# Altium PCB Mini_AHRS_TEST.PcbDoc
Units mil, origin at the board's own origin, x right, y up, seen from the top; angles counter-clockwise.
Board outline 1496.06 x 1496.06 mil, 2 copper layers (Top Layer, Bottom Layer); 59 components, 52 nets, 234 pads, 64 vias.
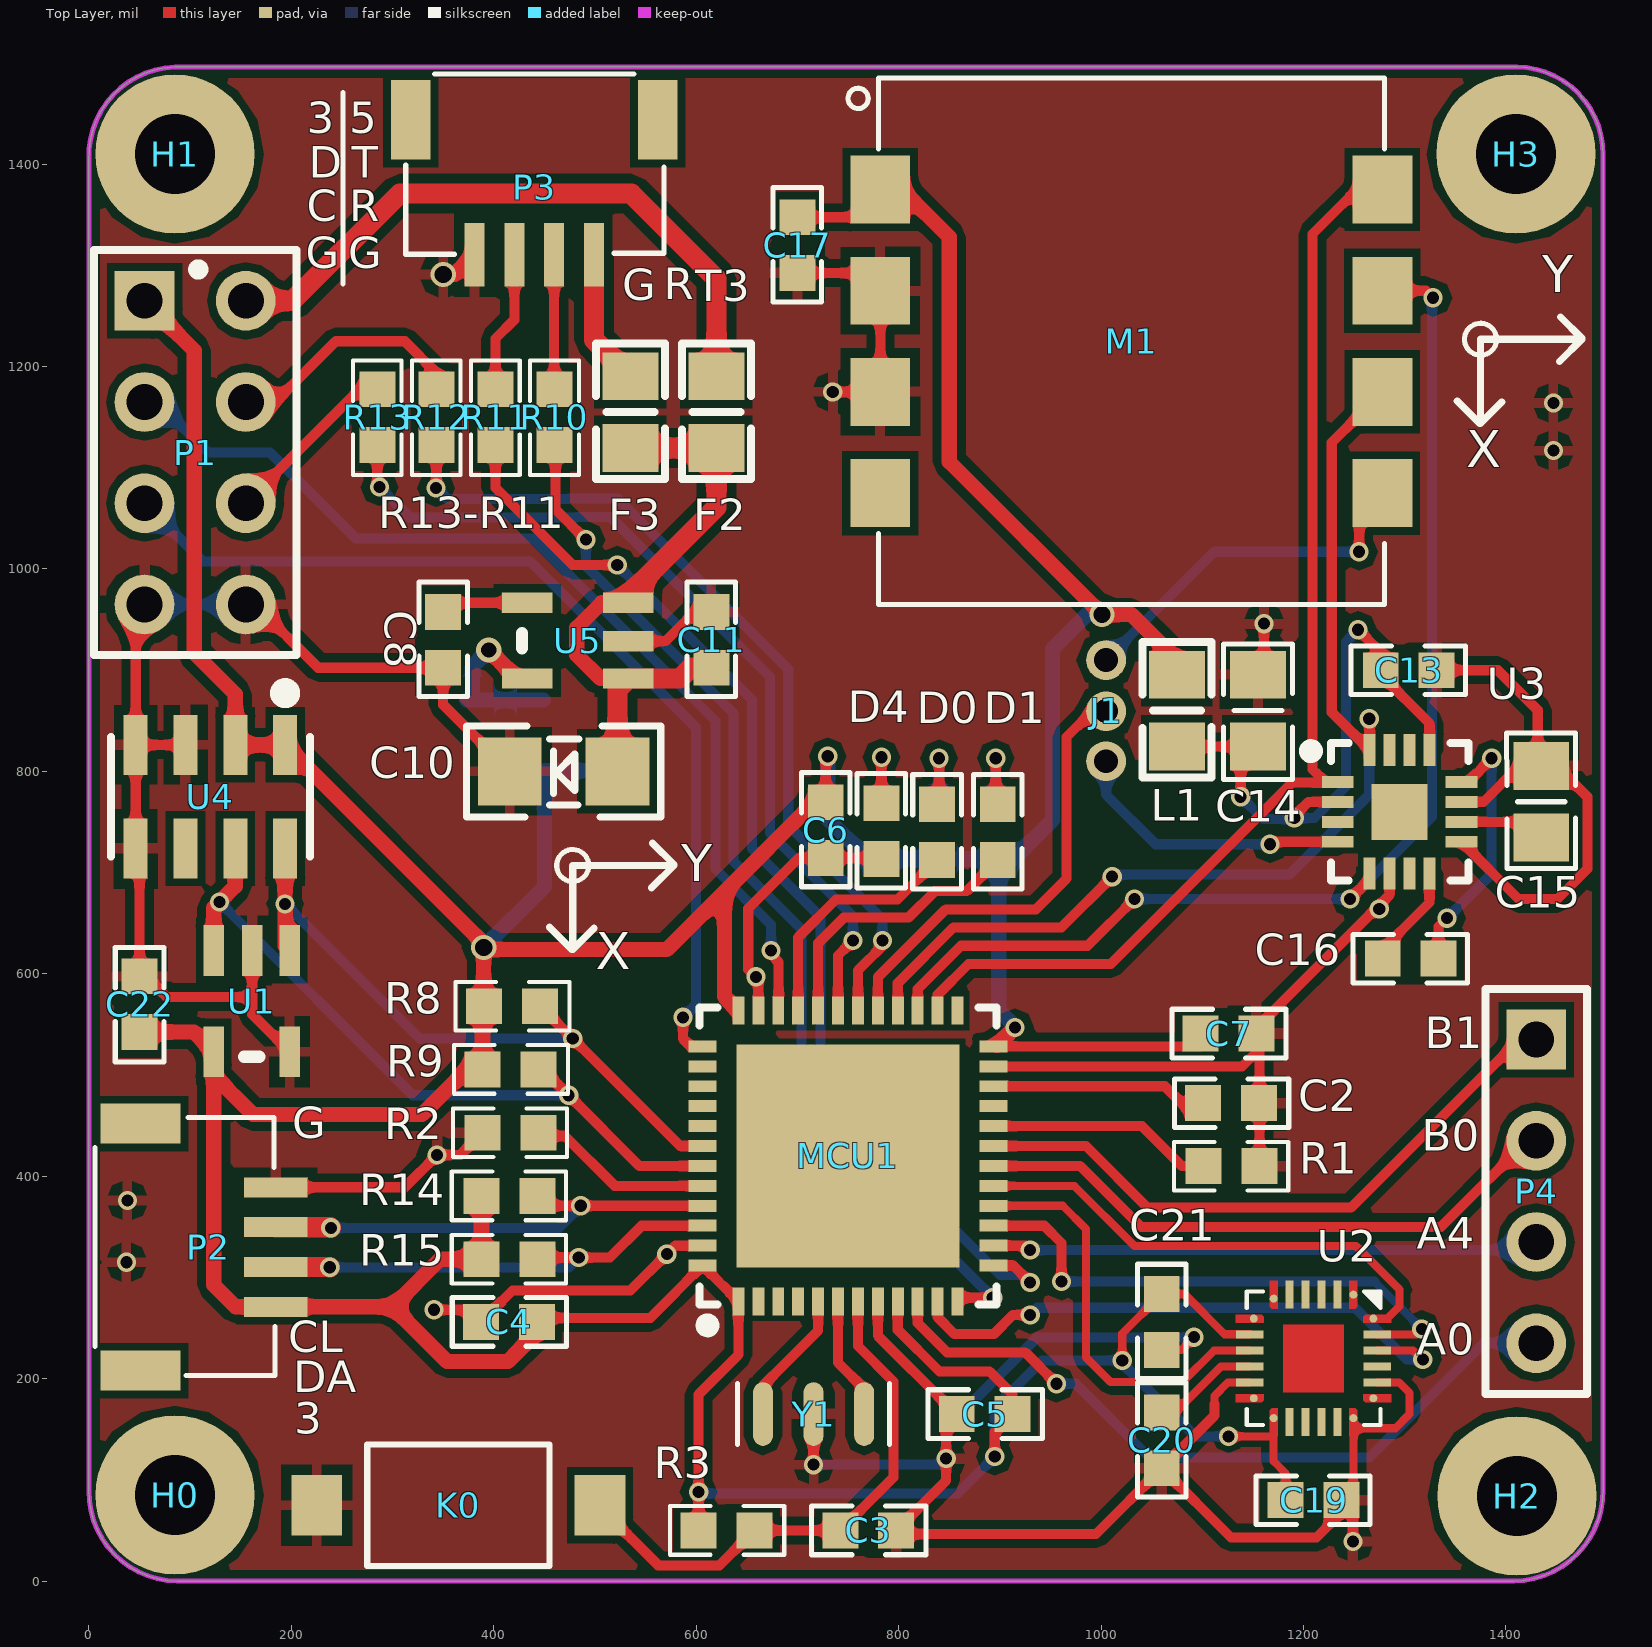
[diagram p0: Top Layer view]
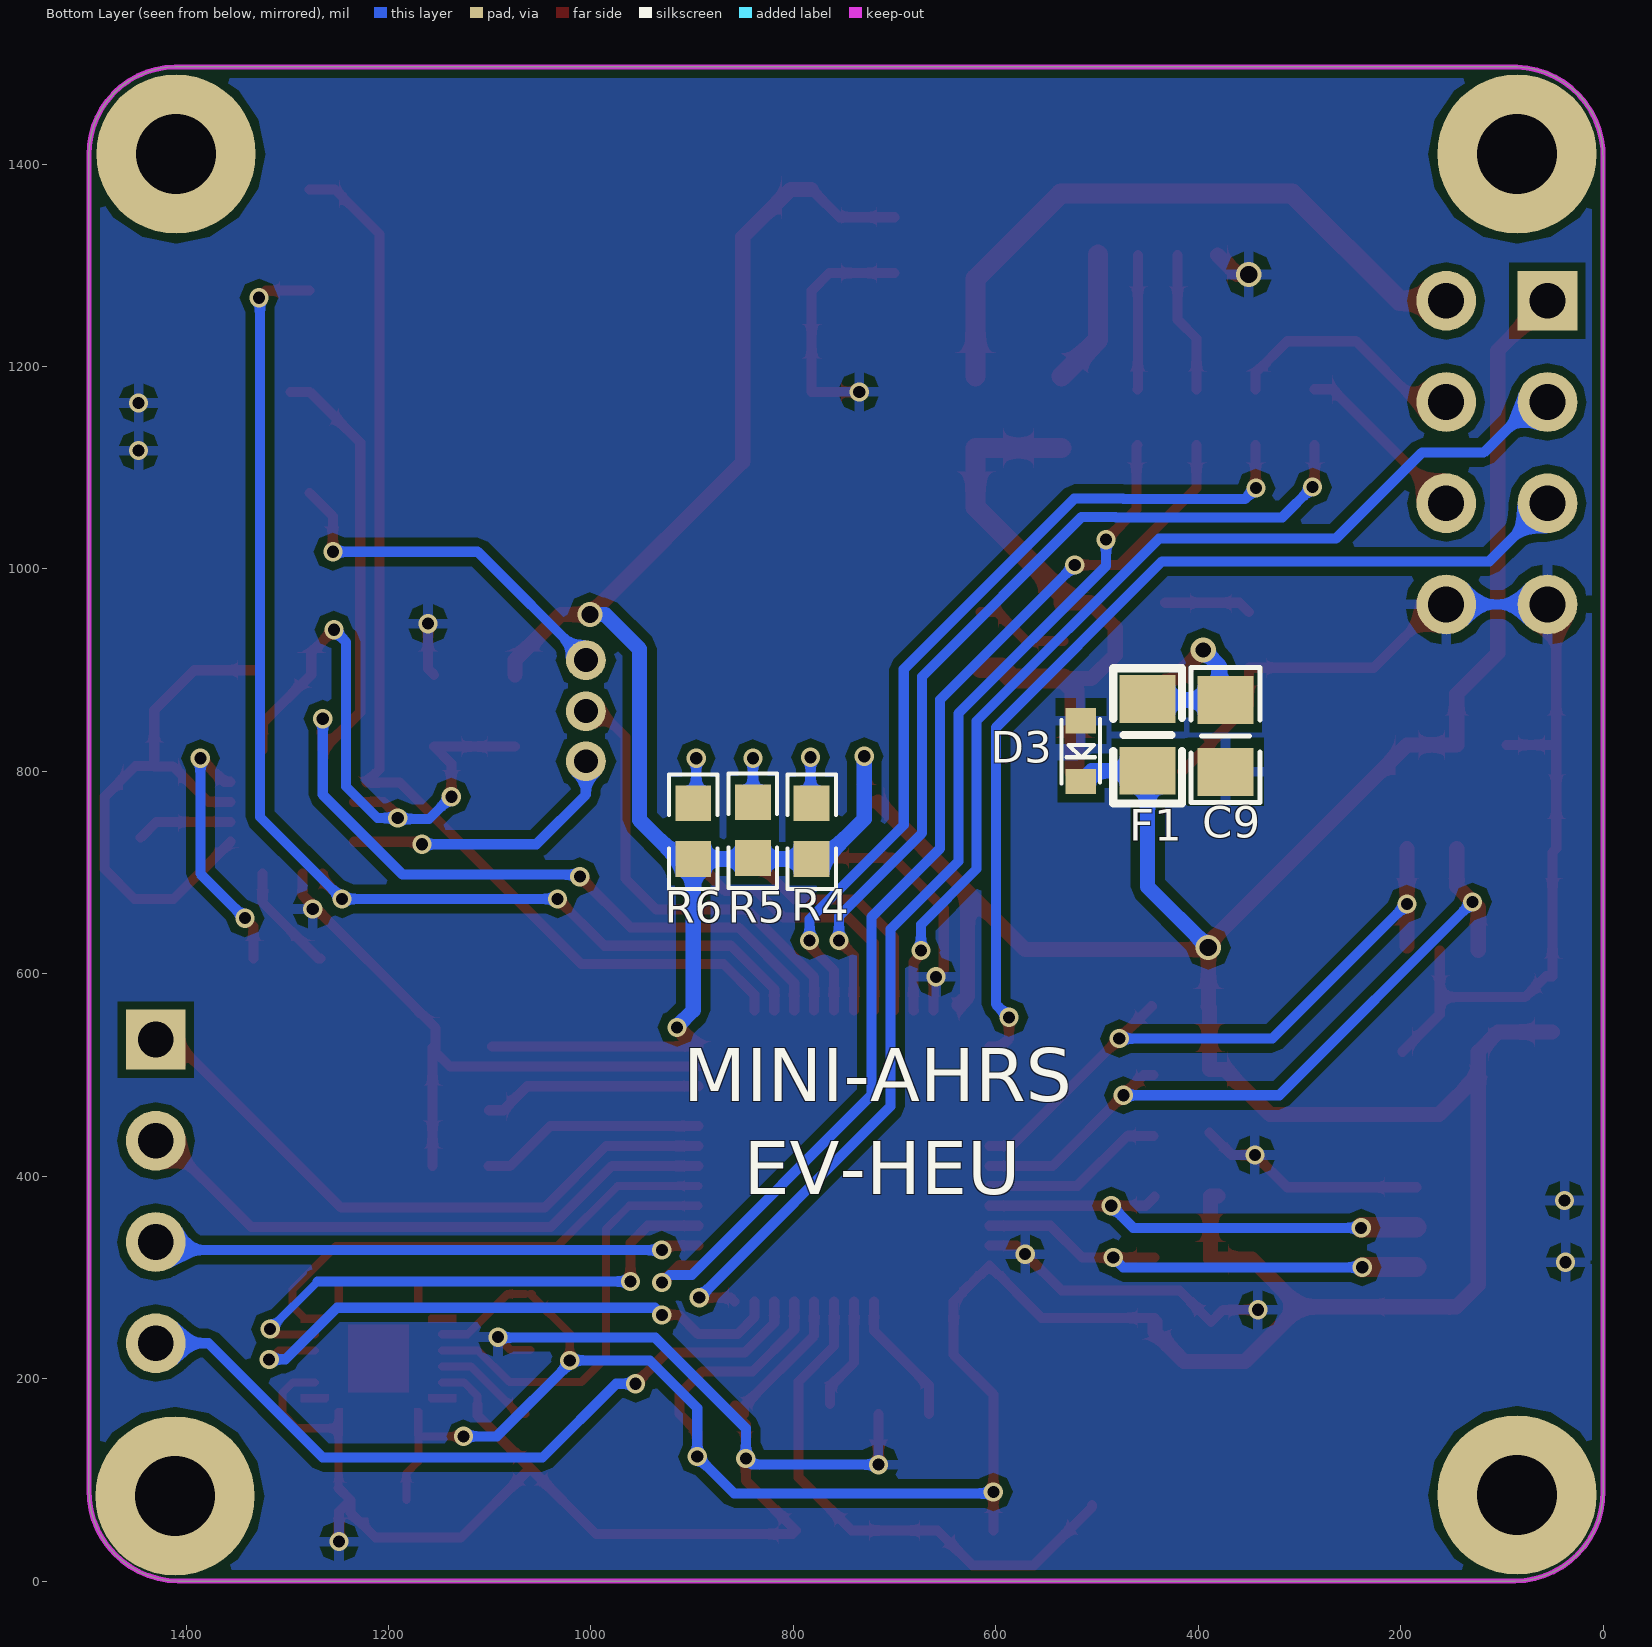
[diagram p1: Bottom Layer view, seen from below]
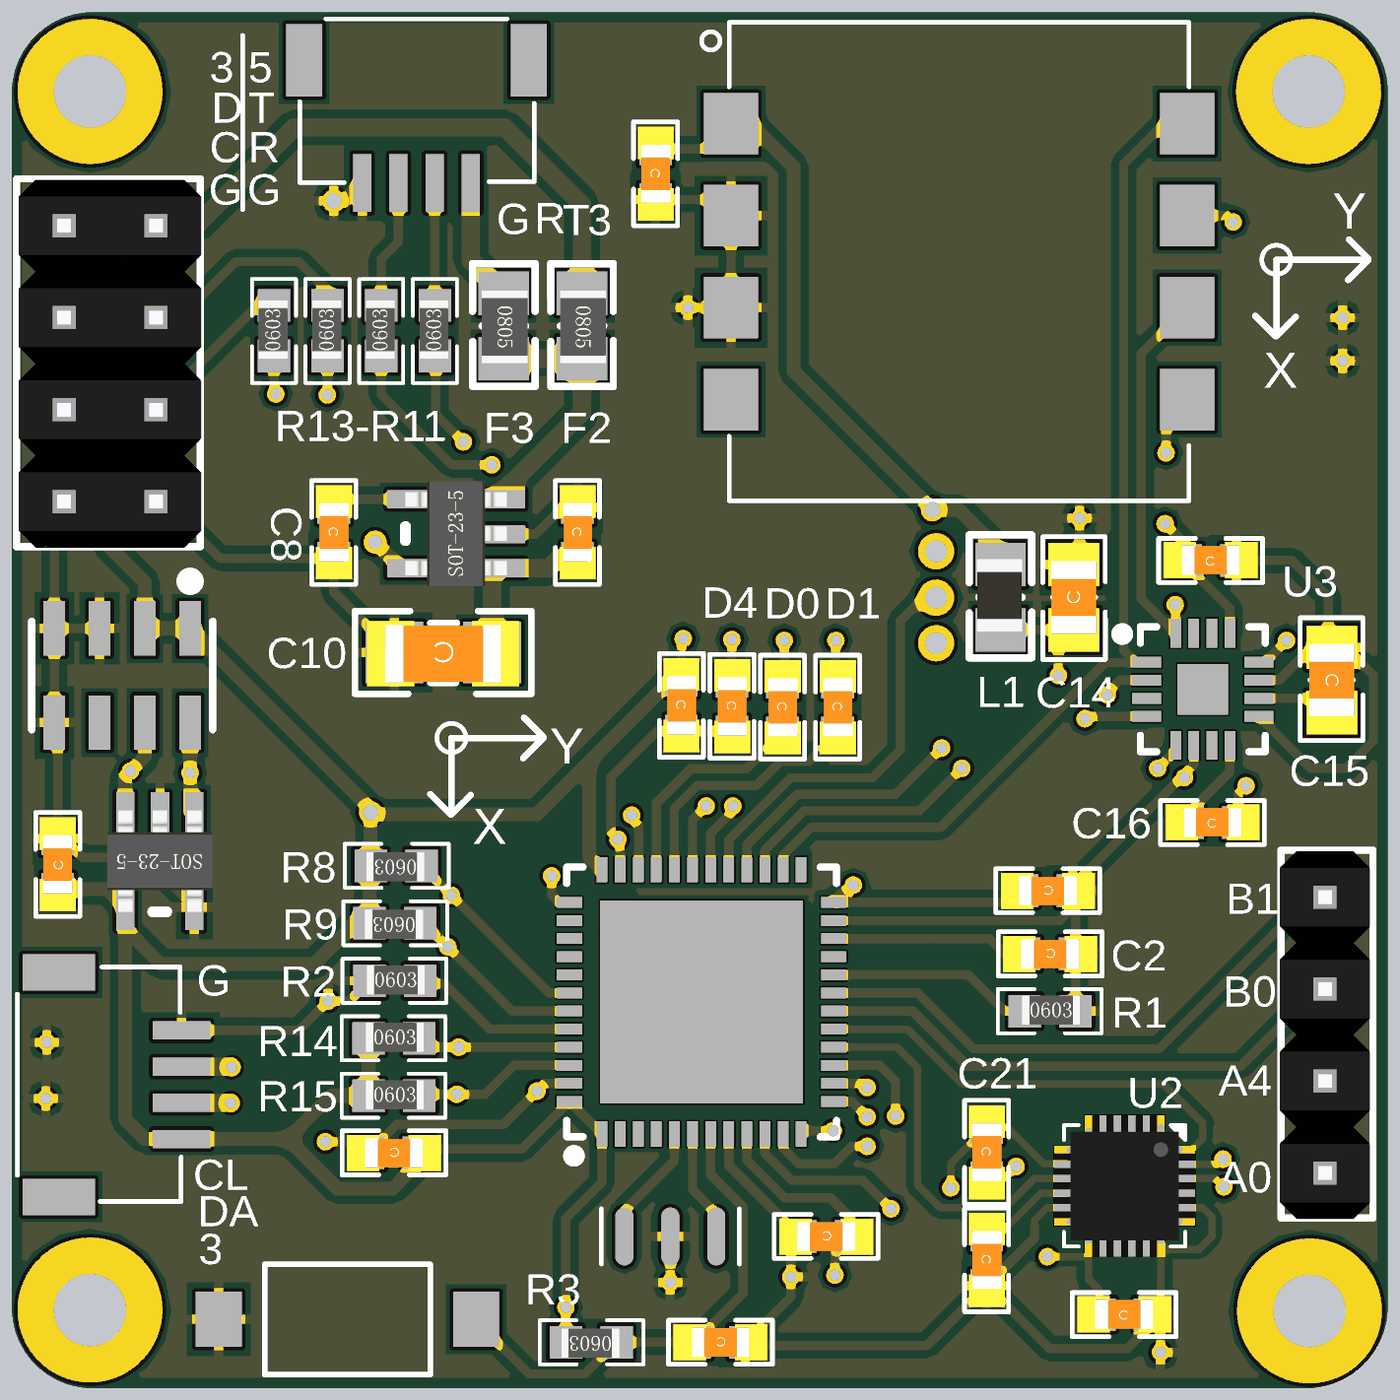
[diagram p2: 3D render of the assembled board from above, using the file's embedded part models]
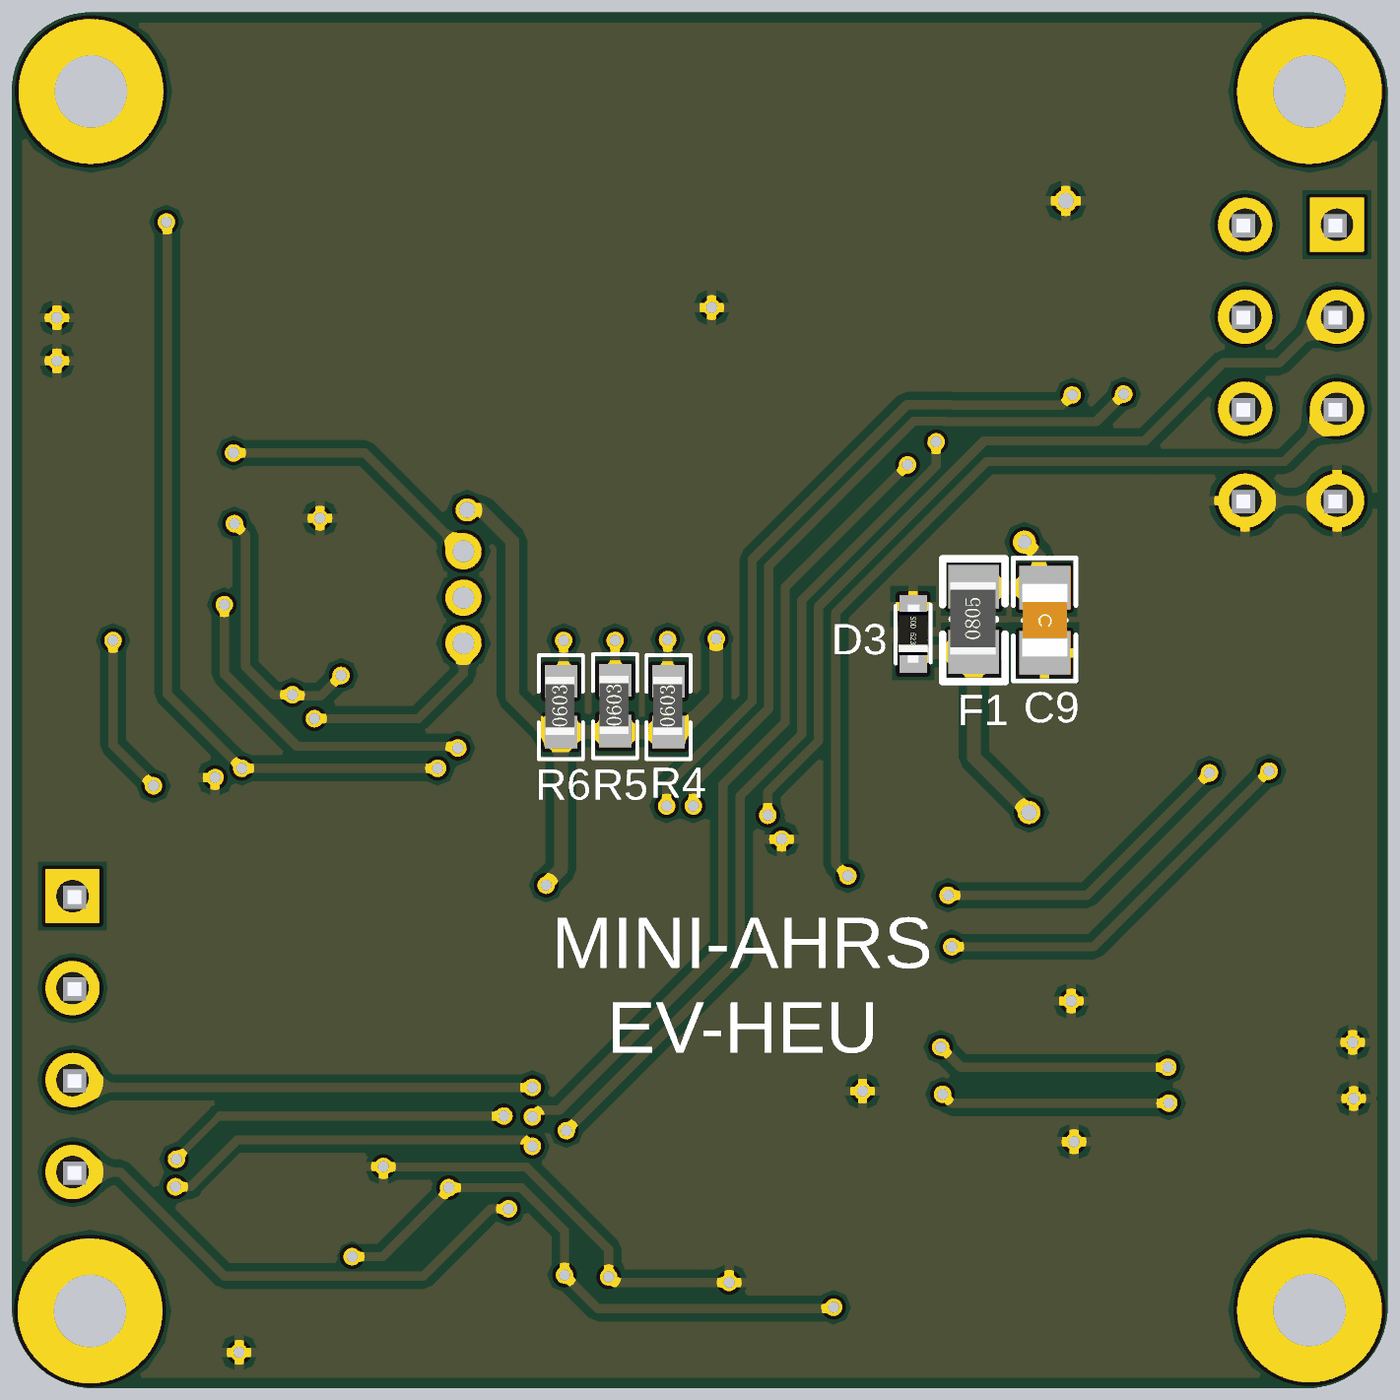
[diagram p3: 3D render of the assembled board from below, using the file's embedded part models]

## Layer stack, top to bottom
Top Solder: solder mask 0.4, Solder Resist, Dk 3.5
Top Layer: signal copper 1.4
Dielectric 1: dielectric 12.6, FR-4, Dk 4.8
Bottom Layer: signal copper 1.4
Bottom Solder: solder mask 0.4, Solder Resist, Dk 3.5

## Board outline
0,89 0,1405 cw(c88.03,1408.03) 85,1496.06 1411,1496.06 cw(c1410,1410) 1496.06,1409 1496.06,90 cw(c1407.03,89.03) 1408,0 87,0 cw(c88,88)

## Design rules (kind name [scope] priority, off if disabled: settings)
Clearance Clearance_SP [All vs HasFootprint('QFN24_3*3*0.4') Or HasFootprint('QFN-48_7x7x05P') Or HasFootprint('QFN-16_3x3x05P') Or HasFootprint('QFN24_4*4*0.5') Or WithinRoom('Room_MPU')] p1: gap=6
Clearance [All] p2: gap=8
HoleSize [All] p1: absolutevalues=TRUE maxlimit=100 minlimit=7.87 maxpercent=80.000 minpercent=20.000
HoleToHoleClearance [All] p1: gap=8 allowstackedmicrovias=TRUE
MinimumSolderMaskSliver [All] p1: minsoldermaskwidth=8
PolygonConnect [All] p1: connectstyle=Relief reliefconductorwidth=10 reliefentries=4 polygonreliefangle="90 Angle" airgapwidth=10
RoomDefinition Room_MPU [InComponentClass('Components Class 1')] p1: confinementstyle=ConfineIn formatcopy=TRUE lockcomponents=FALSE outline 1112,321 1314,321 1314,121 1112,121
RoutingCorners [All] p1: cornerstyle=45-Degree minsetback=10 maxsetback=100
RoutingVias [All] p1: holewidth=11.81 width=19 viastyle="Through Hole" minholewidth=11.81 minwidth=19 maxholewidth=23 maxwidth=30
SilkToSilkClearance [All] p1: silktosilkclearance=5
SilkToSolderMaskClearance [IsPad] p1: minsilkscreentomaskgap=5 clearancetoexposedcopper=TRUE
SolderMaskExpansion [All] p1: expansion=4
Width [All] p1: maxlimit=40 minlimit=5 preferedwidth=8
24 further rules are at their usual default settings.

## Classes and differential pairs
component class "Components Class 1": U2

## Components (designator, comment, footprint, x,y, rotation, side; value= is the part's Value field where it differs from the comment)
C2 "0603" CAP_0603_16*08 1128.5,472.25 r180 top
C3 "0603" CAP_0603_16*08 770,50 r180 top
C4 "0603" CAP_0603_16*08 415,256 r180 top
C5 "0603" CAP_0603_16*08 885,165 r180 top
C6 "0603" CAP_0603_16*08 728,742 r270 top
C7 "0603" CAP_0603_16*08 1126,541 r180 top
C8 "0603" CAP_0603_16*08 350,930 r270 top
C9 "Polar" CAP_0805_20*12 373,835 r270 bottom
C10 "Polar" CAP_1206 469,800 r180 top
C11 "0603" CAP_0603_16*08 615,930 r270 top
C13 "0603" CAP_0603_16*08 1304,900 r0 top
C14 "Polar" CAP_0805_20*12 1155,860 r90 top
C15 "0603" CAP_0805_20*12 1435,770 r270 top
C16 "0603" CAP_0603_16*08 1306,615 r0 top
C17 "0603" CAP_0603_16*08 700,1320 r270 top
C19 "0603" CAP_0603_16*08 1210,80 r0 top
C20 "0603" CAP_0603_16*08 1060,139 r270 top
C21 "0603" CAP_0603_16*08 1060,256 r270 top
C22 "0603" CAP_0603_16*08 50,570 r90 top
D0 "Red" CAP_0603_16*08 838,740 r270 top (schematic designator LED0)
D1 "Green" CAP_0603_16*08 898,740 r270 top (schematic designator LED1)
D3 "Zener/3.3V" SOD523 516,870 r270 bottom
D4 "Blue" CAP_0603_16*08 783,741 r270 top
F1 "Fuse" RES_0805_20*12 450,836 r90 bottom
F2 "Fuse" RES_0805_20*12 620,1155 r270 top
F3 "Fuse" RES_0805_20*12 535,1155 r270 top
H0 "Pad-SCREW" PAD_M2 85,85 r0 top
H1 "Pad-SCREW" PAD_M2 85,1410 r0 top
H2 "Pad-SCREW" PAD_M2 1411,84 r0 top
H3 "Pad-SCREW" PAD_M2 1410,1410 r0 top
J1 "Header 3" HEADER1*3sig 1005,860 r270 top
K0 "KEY" KEY_2 365,75 r90 top
L1 "MODEL?" IND_0805_20*12 1075,860 r270 top
M1 "RM3100" RM3100_MODEUL 1030,1225 r0 top locked
MCU1 "STM32F401C" QFN-48_7x7x05P 750,420 r0 top locked
P1 "SWD&UASRT" HEADER2*4_PIN 105,1115 r270 top
P2 "Header 4" JST_CH1.0_4P 185,330 r90 top
P3 "Header 4" JST_CH1.0_4P 440,1310 r0 top
P4 "Header 4" HEADER1*4_PIN 1430,385 r270 top
R1 "SMD" RES_0603_16*08 1129,410 r0 top
R2 "SMD" RES_0603_16*08 416.5,443 r0 top
R3 "SMD" RES_0603_16*08 630,50 r180 top
R4 "SMD" RES_0603_16*08 782,741 r90 bottom
R5 "SMD" RES_0603_16*08 840,742 r90 bottom
R6 "SMD" RES_0603_16*08 899,741 r90 bottom
R8 "SMD" RES_0603_16*08 418,568 r180 top
R9 "SMD" RES_0603_16*08 416.5,505.5 r180 top
R10 "SMD" RES_0603_16*08 460,1150 r90 top
R11 "SMD" RES_0603_16*08 401.67,1150 r90 top
R12 "SMD" RES_0603_16*08 343.33,1150 r90 top
R13 "SMD" RES_0603_16*08 285,1150 r90 top
R14 "SMD" RES_0603_16*08 415.5,380.5 r0 top
R15 "SMD" RES_0603_16*08 415.5,318 r0 top
U1 "AT24C02" SOT23-5 165,585 r0 top locked
U2 "MPU6500" QFN24_3*3*0.4 1210,220 r270 top locked
U3 "HMC5983" QFN-16_3X3X05P 1295,760 r270 top locked
U4 "MS5611" MS5611 120,775 r270 top locked
U5 "MIC5219" SOT23-5 495,925 r270 top
Y1 "XTAL_8M" XTAL_SMD_8M 716,165 r0 top

## Footprints (in the part's own frame and the unit in brackets; to place one, negate y for a bottom-side part, rotate by r counter-clockwise, add the part's x,y. Pads: shape width x height; smd on the part's side, far side on the other; paste and mask are expansions set on the pad)
CAP_0603_16*08 [mm]
  rect 0.9x0.9 smd: 1(-0.7,0) 2(0.7,0)
  silkscreen extent -1.45,-0.61 1.42,0.61, body extent -1.31,-0.49 1.29,0.51, height 0.89
CAP_0805_20*12 [mm] "Chip Resistor, Body 2.0x1.2mm, IPC Medium Density"
  rect 1.2x1.4 smd: 1(-0.9,0) 2(0.9,0)
  silkscreen extent -1.72,-0.87 1.67,0.86, body extent -1.5,-0.69 1.5,0.71, height 0.93
CAP_1206 [mm] "Chip Capacitor, Body 3.2x1.6mm, IPC High Density"
  rect 1.6x1.7 smd: 1(-1.35,0) 2(1.35,0)
  silkscreen extent -2.44,-1.14 2.44,1.14, body extent -2.1,-0.87 2.1,0.93, height 0.95
HEADER1*3sig [mm]
  round 1 hole 0.6: 1(-1.27,0) 2(0.013,0) 3(1.27,0)
HEADER1*4_PIN [mm]
  rect 1.5x1.5 hole 0.9: 1(-3.81,0)
  round 1.5 hole 0.9: 2(-1.27,0) 3(1.27,0) 4(3.81,0)
  silkscreen extent -5.08,-1.27 5.08,1.27, body extent -5.05,-1.31 5.11,1.19, height 8.67
HEADER2*4_PIN [mm] "Connector; Header; 4x2 Position"
  rect 1.5x1.5 hole 0.9: 1(-3.81,-1.27)
  round 1.5 hole 0.9: 2(-1.27,-1.27) 3(1.27,-1.27) 4(3.81,-1.27) 5(-3.81,1.27) 6(-1.27,1.27) 7(1.27,1.27) 8(3.81,1.27)
  silkscreen extent -5.08,-2.54 5.08,2.54, body extent -5.05,-2.47 5.11,2.57, height 8.54
IND_0805_20*12 [mm] "Chip Inductor, Body 2.0x1.2mm, IPC Medium Density"
  rect 1.2x1.4 smd: 1(-0.9,0) 2(0.9,0)
  silkscreen extent -1.72,-0.87 1.67,0.86, body extent -1.05,-0.65 0.95,0.6, height 0.5
JST_CH1.0_4P [mm]
  rect 1x2 smd: 0(-3.1,3.404) 0(3.1,3.404)
  rect 0.5x1.6 smd: 1(-1.5,0.01) 2(-0.5,0.01) 3(0.5,0.01) 4(1.5,0.01)
  silkscreen extent -3.23,0.03 3.25,4.55
KEY_2 [mil]
  rect 60x50 smd: 1(0,140) 2(0,-140)
  silkscreen extent -60,-90 60,90
MS5611 [mm]
  rect 1.5x0.6 smd: 1(-1.3,1.875) 2(-1.3,0.625) 3(-1.3,-0.625) 4(-1.3,-1.875) 5(1.3,-1.875) 6(1.3,-0.625) 7(1.3,0.625) 8(1.3,1.875)
  silkscreen extent -2.73,-2.5 1.5,2.5
PAD_M2 [mm]
  round 4 hole 2: 1(0,0)
QFN24_3*3*0.4 [mm] "QFN, 24-Leads, Body 3.00x3.00mm, Pitch 0.40mm, Thermal Pad 1.54x1.70mm, IPC Medium Density"
  round 0.2 smd mask+0: 1(-1.6,1) 6(-1.5,-1) 7(-1,-1.5) 12(1,-1.5) 13(1.5,-1) 18(1.5,1) 19(1,1.5) 24(-1,1.5)
  rect 0.7x0.2 smd mask+0.025: 2(-1.6,0.6) 3(-1.6,0.2) 4(-1.6,-0.2) 5(-1.6,-0.6) 14(1.6,-0.6) 15(1.6,-0.2) 16(1.6,0.2) 17(1.6,0.6)
  rect 0.2x0.7 smd mask+0.025: 8(-0.6,-1.6) 9(-0.2,-1.6) 10(0.2,-1.6) 11(0.6,-1.6) 20(0.6,1.6) 21(0.2,1.6) 22(-0.2,1.6) 23(-0.6,1.6)
  Top Layer region: -0.85,-0.77 0.85,-0.77 0.85,0.77 -0.85,0.77
  Top Layer region: 1.95,0.9 1.25,0.9 1.25,1.05 1.3,1.1 1.95,1.1
  Top Layer region: 1.1,1.95 1.1,1.3 1.05,1.25 0.9,1.25 0.9,1.95
  Top Layer region: 0.9,-1.95 0.9,-1.25 1.05,-1.25 1.1,-1.3 1.1,-1.95
  Top Layer region: 1.95,-1.1 1.3,-1.1 1.25,-1.05 1.25,-0.9 1.95,-0.9
  Top Layer region: -1.95,-0.9 -1.25,-0.9 -1.25,-1.05 -1.3,-1.1 -1.95,-1.1
  Top Layer region: -1.1,-1.95 -1.1,-1.3 -1.05,-1.25 -0.9,-1.25 -0.9,-1.95
  Top Layer region: -1.95,1.1 -1.3,1.1 -1.25,1.05 -1.25,0.9 -1.95,0.9
  Top Layer region: -0.9,1.95 -0.9,1.25 -1.05,1.25 -1.1,1.3 -1.1,1.95
  silkscreen extent -1.68,-1.68 1.68,1.68, body extent -1.5,-1.5 1.5,1.5, height 0.9
QFN-16_3X3X05P [mm] "QFN, 16-Leads, Body 3.00x3.00mm, Pitch 0.50mm, Thermal Pad 1.70x1.70mm, IPC Medium Density"
  rect 1.4x1.4 smd mask+0.051: 0(0,0)
  rect 0.3x0.8 smd mask+0.051: 1(-0.75,-1.55) 2(-0.25,-1.55) 3(0.25,-1.55) 4(0.75,-1.55) 9(0.75,1.55) 10(0.25,1.55) 11(-0.25,1.55) 12(-0.75,1.55)
  rect 0.8x0.3 smd mask+0.051: 5(1.55,-0.75) 6(1.55,-0.25) 7(1.55,0.25) 8(1.55,0.75) 13(-1.55,0.75) 14(-1.55,0.25) 15(-1.55,-0.25) 16(-1.55,-0.75)
  silkscreen extent -1.73,-2.37 1.73,1.73
QFN-48_7x7x05P [mm]
  rect 5.6x5.6 smd mask+0.051: 0(0,0)
  rect 0.3x0.7 smd mask+0.051: 1(-2.75,-3.65) 2(-2.25,-3.65) 3(-1.75,-3.65) 4(-1.25,-3.65) 5(-0.75,-3.65) 6(-0.25,-3.65) 7(0.25,-3.65) 8(0.75,-3.65) 9(1.25,-3.65) 10(1.75,-3.65) 11(2.25,-3.65) 12(2.75,-3.65) 25(2.75,3.65) 26(2.25,3.65) 27(1.75,3.65) 28(1.25,3.65) 29(0.75,3.65) 30(0.25,3.65) 31(-0.25,3.65) 32(-0.75,3.65) 33(-1.25,3.65) 34(-1.75,3.65) 35(-2.25,3.65) 36(-2.75,3.65)
  rect 0.7x0.3 smd mask+0.051: 13(3.65,-2.75) 14(3.65,-2.25) 15(3.65,-1.75) 16(3.65,-1.25) 17(3.65,-0.75) 18(3.65,-0.25) 19(3.65,0.25) 20(3.65,0.75) 21(3.65,1.25) 22(3.65,1.75) 23(3.65,2.25) 24(3.65,2.75) 37(-3.65,2.75) 38(-3.65,2.25) 39(-3.65,1.75) 40(-3.65,1.25) 41(-3.65,0.75) 42(-3.65,0.25) 43(-3.65,-0.25) 44(-3.65,-0.75) 45(-3.65,-1.25) 46(-3.65,-1.75) 47(-3.65,-2.25) 48(-3.65,-2.75)
  silkscreen extent -3.73,-4.4 3.72,3.72
RES_0603_16*08 [mm]
  rect 0.9x0.9 smd: 1(-0.7,0) 2(0.7,0)
  silkscreen extent -1.45,-0.61 1.42,0.61, body extent -0.77,-0.37 0.83,0.43, height 0.5
RES_0805_20*12 [mm] "Chip Resistor, Body 2.0x1.2mm, IPC Medium Density"
  rect 1.2x1.4 smd: 1(-0.9,0) 2(0.9,0)
  silkscreen extent -1.72,-0.87 1.67,0.86, body extent -0.97,-0.6 1.03,0.66, height 0.68
RM3100_MODEUL [mm]
  rect 1.5x1.7 smd: 1(-6.3,3.81) 2(-6.3,1.27) 3(-6.3,-1.27) 4(-6.3,-3.81) 5(6.3,-3.81) 6(6.3,-1.27) 7(6.3,1.27) 8(6.3,3.81)
  silkscreen extent -7.11,-6.6 6.35,6.6
SOD523 [mil]
  rect 25x30 smd: 1(20,0) 2(80,0)
  silkscreen extent 18,-19 82,19, body extent 18,-16 81,16, height 26
SOT23-5 [mil]
  rect 20x50 smd: 1(33.3,38) 2(-3.7,38) 3(-41.7,38) 4(-41.7,-62) 5(33.3,-62)
  silkscreen extent -12,-67 3,-67, body extent -61,-67 53,43, height 48
XTAL_SMD_8M [mm]
  oval 0.5x1.6 smd: 1(-1.27,0) 2(1.27,0) 3(0,0)
  silkscreen extent -1.91,-0.76 1.91,0.76

## Part data
C2 C3 C4 C5 C6 C7 C8 C11 C13 C15 C16 C17 C19 C20 C21 C22: library part Cap, "Capacitor"
C9 C10 C14: library part "Cap Pol", "Polarized Capacitor (Axial)"
D0 D1 D4: library part LED, "Typical RED, GREEN, YELLOW, AMBER GaAs LED"
D3: library part "D Zener", "Zener Diode"
F1 F2 F3: library part "Fuse 1"
J1: "Header, 3-Pin"
L1: library part Inductor, "Inductor"
M1: library part RM3100_MODEUL
MCU1: library part STM32F401C*U6
P1: library part "Header 4X2", "Header, 4-Pin, Dual row"
P2 P3 P4: "Header, 4-Pin"
R1 R2 R3 R4 R5 R6 R8 R9 R10 R11 R12 R13 R14 R15: library part RES_SMD, "Resistor"
U1: library part AT24C02-5Pin

## Via types
v1: diameter 19, hole 12, Top Layer to Bottom Layer, 60 vias
v2: diameter 25, hole 17, Top Layer to Bottom Layer, 3 vias
v3: diameter 25, hole 15, Top Layer to Bottom Layer, 1 vias

## Nets (pads, with @x,y where several pads share a name; then routed paths per layer and width w, separated by ;. In a path a pad name is that pad's centre, name@x,y a point inside that pad or via, vN(x,y) a via of type N, cw(c..) or ccw(c..) an arc to the next point about the centre after c; other vN are vias at no path point)
GND: C2.1 C3.1 C4.2 C5.2 C6.2 C7.1 C8.2 C9.2 C10.2 C11.1 C13.2 C14.2 C15.1 C17.2 C19.2 C20.2 C21.2 C22.2 D3.1 D4.2 K0.1 M1.2 M1.3 MCU1.8 MCU1.23 MCU1.35 MCU1.47 P1.4 P1.8 P2.4 P3.1 R1.2 R2.1 U1.2 U1.5 U2.11 U2.18 U2.20 U3.6 U3.9 U3.11 U4.3 U4.4 U4.5 U5.2 Y1.3 | length 5225.3
  Top Layer w8: C21.2 1079.44,228.44 v1(1092,241) ; 1112,175 1112,182.78 1125.6,196.38 U2.11 ; C7.1@1153.56,530 C7.1@1156.56,527 ; C19.2@1249.37,91.81 1249.37,151 ; U2.18 1249.37,151 ; U2.20 1294.62,196.38 1305,186 1305,165 1291,151 1249.37,151
  Top Layer w10: P1.4 46.18,956.18 U4.4 ; U4.3 U4.4 ; P1.8 164,965 226.56,902.44 C8.2 350,865.85 C10.2 ; 161.3,577 77,577 56.44,597.56 C22.2 50,720 U4.5 U4.4 ; U1.2 161.3,560 U1.5 ; P2.4 312.06,389.06 v1(344,421) 366.94,421 R2.1 ; v1(341,268) 375.44,268 C4.2 418.44,287 535,287 v1(571,323) 579.42,331.42 MCU1.47 ; U5.2 569.7,928.7 598.56,957.56 C11.1 ; v1(659,597) v1@661.42,594.58 ; MCU1.35 v1@661.42,594.58 ; C17.2 764.53,1292.44 M1.2 M1.3 v1(735,1175) ; v1(716,115) Y1.3 ; MCU1.8 779.53,242.47 848.88,173.12 848.88,165 857.44,173.56 C5.2 847,154.56 v1(847,121) 847,99.44 C3.1 801.12,46.44 995,46.44 C20.2 ; D4.2 782,714.44 C6.2 701.44,714.44 651.5,664.5 651.5,604.5 v1@661.42,594.58 ; MCU1.23 893.88,508.4 1139.4,508.4 1153.56,522.56 1153.56,530 1153.56,546.56 1285.16,678.16 U3.6 ; 1112,175 1112,163.44 C20.2 ; C14.2 1161,901.43 v1(1161,946) ; R1.2 C7.1@1156.56,527 ; v1(1249,39) 1249,68.56 C19.2 ; C19.2@1249.37,91.81 C19.2 ; C13.2 1392,900 1431.57,860.43 1431.57,805 1413,805 1377.84,769.84 U3.11 ; U3.9 1412.5,674 1451,674 1480.56,703.56 1480.56,775 1450.13,805.43 C15.1 ; C20.2 1128.44,43 1213,43 1237.56,67.56 C19.2
  Top Layer w15: v2(350,1291) 361.55,1291 P3.1
  Bottom Layer w10: P1.4 P1.8 ; v1(716,115) 841,115 v1(847,121) 847,151 936.5,240.5 1091.5,240.5 v1(1092,241)
  other v1: 37,315 38,376 1275,664 1447,1117 1447,1164
HMC_CS: J1.3 U3.4 | length 283.3
  Top Layer w10: v1(1167,728) 1169.47,730.47 U3.4
  Bottom Layer w10: J1.3 1005,777 1054,728 v1(1167,728)
LED0: D0.2 MCU1.33 | length 241.2
  Top Layer w10: MCU1.33 700.79,636.06 738.22,673.5 798.88,673.5 D0.2@837.91,712.53
LED1: D1.2 MCU1.32 | length 278.1
  Top Layer w10: MCU1.32 720.47,630.29 745.68,655.5 809.68,655.5 835.9,681.72 867.28,681.72 D1.2
M_CS: J1.2 MCU1.29 | length 449.3
  Top Layer w10: MCU1.29 779.53,596.57 846.68,663.72 935.72,663.72 966,694 966,834 991.5,859.5 J1.2
MISO1: MCU1.16 U2.9 | length 412.9
  Top Layer w8: MCU1.16 962.21,370.79 985,348 985,221 1009.5,196.5 1080.46,196.5 1111.84,227.87 U2.9
MISO2: M1.7 MCU1.27 U3.5 | length 1199.7
  Top Layer w10: MCU1.27 818.9,585.03 861.59,627.72 986.72,627.72 v1(1033,674) ; v1(1246,674) 1265.47,693.47 U3.5 ; M1.7 1321,1275 v1(1328,1268)
  Bottom Layer w10: v1(1033,674) v1(1246,674) 1327,755 1327,1268 v1(1328,1268)
MOSI1: MCU1.17 U2.24 | length 491.2
  Top Layer w8: MCU1.17 973.62,390.47 1033.09,331 1252,331 1295,288 1295,271.54 1282.83,259.37 U2.24
MOSI2: M1.6 MCU1.28 U3.16 | length 1084.5
  Top Layer w10: MCU1.28 799.21,590.8 854.14,645.72 960.72,645.72 v1(1011,696) ; v1(1265,852) 1265.47,851.53 U3.16 1228,858.5 1228,1124.97 M1.6 M1.6@1297,1175
  Bottom Layer w10: v1@1011,698 1186,698 1265,777 v1(1265,852)
MPU_CS: MCU1.11 U2.22 | length 583.9
  Top Layer w8: U2.22 1308.13,227.87 1318,218 v1(1318,219)
  Top Layer w10: MCU1.11 838.58,260.74 855.33,244 894,244 913,263 v1(930,263)
  Bottom Layer w10: v1(930,263) 937,270 1251,270 1302,219 v1(1318,219)
MPU_INT: U2.12
NetC2_2: C2.2 MCU1.22 | length 217
  Top Layer w10: MCU1.22 1063.1,488.9 1086.75,465.25 C2.2@1100.94,465.25
NetC3_2: C3.2 K0.2 MCU1.7 R3.1 | length 540.2
  Top Layer w10: K0.2 505,73 562.5,15.5 623.06,15.5 R3.1 C3.2 795,102.56 795,197 759.84,232.16 MCU1.7
NetC8_1: C8.1 U5.4 | length 86.8
  Top Layer w10: C8.1 359.14,966.7 U5.4
NetC9_1: C9.1 F1.2 U5.5 | length 185.8
  Top Layer w10: U5.5@423.3,891.7 U5.5
  Top Layer w15: v3(395,920) U5.5@423.3,891.7
  Bottom Layer w10: C9.1 C9.1@379,876.43 ; F1.2@449,870.43 F1.2
  Bottom Layer w15: C9.1 F1.2@449,870.43 ; C9.1@379,876.43 379,904 v3(395,920)
NetC13_1: C13.1 C14.1 L1.2 U3.2 U3.13 | length 621.8
  Top Layer w10: L1.2 C14.1 1138,807.57 v1(1138,775) ; v1(1191,754) 1191,756 1204.84,769.84 U3.2 ; v1(1254,940) 1276.44,917.56 C13.1 1276.44,895.56 1324.53,847.47 U3.13
  Bottom Layer w10: v1(1138,775) 1160,753 1190,753 v1(1191,754) 1211,754 1242,785 1242,928 v1(1254,940)
NetC15_2: C15.2 U3.10 | length 95.4
  Top Layer w10: U3.10 1429.41,750.16 C15.2@1445,734.57
NetC16_1: C16.1 U3.8 | length 108.5
  Top Layer w10: C16.1@1267.44,615 1269,615 1324.53,670.53 U3.8
NetC16_2: C16.2 U3.12 | length 259.4
  Top Layer w10: C16.2 1333.56,646.56 v1(1342,655) ; U3.12 1362.53,789.53 v1(1386,813)
  Bottom Layer w10: v1(1342,655) 1386,699 v1(1386,813)
NetC20_1: C20.1 U2.10 | length 101.6
  Top Layer w8: C20.1@1065,165.12 1071.71,165.12 1118.46,211.87 1147.01,211.87 U2.10
NetD4_1: D4.1 R4.2 | length 91.3
  Top Layer w10: D4.1 v1(783,814)
  Bottom Layer w10: R4.2 783,769.56 v1(783,814)
NetF2_1: F2.1 P1.5 | length 640.3
  Top Layer w20: P1.5 201,1265 307,1371 536,1371 620,1287 F2.1
NetF3_1: F3.1 P3.4 | length 134.8
  Top Layer w20: P3.4 499.06,1226.38 F3.1
NetLED0_1: D0.1 R5.2 | length 89.7
  Top Layer w10: D0.1 840,769.56 v1(840,813)
  Bottom Layer w10: R5.2 v1(840,813)
NetLED1_1: D1.1 R6.2 | length 92
  Top Layer w10: v1(896,813) 896,769.56 D1.1
  Bottom Layer w10: v1(896,813) 896,771.56 R6.2
NetMCU1_5: MCU1.5 Y1.1 | length 133.9
  Top Layer w10: Y1.1 666,193 720.47,247.47 MCU1.5
NetMCU1_6: MCU1.6 Y1.2 | length 111.2
  Top Layer w10: MCU1.6 740.16,215.84 764,192 Y1.2@764,175
NetMCU1_20: MCU1.20 R1.1 | length 224.1
  Top Layer w10: MCU1.20 1040.47,449.53 1080,410 R1.1
NetMCU1_44: MCU1.44 R2.2 | length 182.7
  Top Layer w10: R2.2@444.06,439.8 470.2,439.8 519.53,390.47 MCU1.44
NetP1_6: P1.6 R12.2 | length 242.3
  Top Layer w10: P1.6 184,1165 244,1225 312,1225 343.33,1193.67 R12.2
NetP1_7: P1.7 R13.2 | length 176.6
  Top Layer w10: P1.7 267.56,1177.56 R13.2
NetP3_2: P3.2 R11.2 | length 140.6
  Top Layer w10: R11.2 401.67,1227.67 420.31,1246.31 P3.2
NetP3_3: P3.3 R10.2 | length 133
  Top Layer w10: P3.3 459.68,1177.87 R10.2
PA0: MCU1.10 P4.4 | length 734.3
  Top Layer w10: MCU1.10 818.9,254.97 847.87,226 925,226 v1(956,195)
  Bottom Layer w10: v1(956,195) 975,195 1048,122 1265,122 1378,235 P4.4
PA4: MCU1.14 P4.3 | length 541.4
  Top Layer w10: MCU1.14 925.58,331.42 v1(930,327)
  Bottom Layer w10: v1(930,327) 1422,327 P4.3
PB0: MCU1.18 P4.2 | length 600.2
  Top Layer w10: MCU1.18 979.39,410.16 1039.54,350 1336,350 P4.2@1430,444
PB1: MCU1.19 P4.1 | length 630.3
  Top Layer w10: MCU1.19 985.16,429.84 1046,369 1247,369 1413,535 P4.1
RM_CS: J1.1 M1.5 | length 361.9
  Top Layer w10: v1(1255,1017) 1255,1051.97 M1.5
  Bottom Layer w10: J1.1 1112,1017 v1(1255,1017)
RX1: MCU1.31 R13.1 | length 876.3
  Top Layer w10: R13.1 285,1083 v1(287,1081) ; MCU1.31 740.16,618.16 v1(755,633)
  Bottom Layer w10: v1(287,1081) 317,1051 481.18,1051 481.68,1051.5 515.04,1051.5 673,893.54 673,739 755,657 v1(755,633)
RX2: MCU1.13 R11.1 | length 1128.2
  Top Layer w10: R11.1 401.67,1080.33 478,1004 v1(522,1004) ; MCU1.13 913.27,311.73 v1(930,295)
  Bottom Layer w10: v1(522,1004) 655,871 655,724 723,656 723,480 900.5,302.5 922.5,302.5 v1(930,295)
SCK1: MCU1.15 U2.23 | length 534.1
  Top Layer w8: U2.23 1311.62,243.62 v1(1317,249)
  Top Layer w10: MCU1.15 943.9,351.1 961,334 v1(961,296)
  Bottom Layer w8: 1270,296 v1(1317,249)
  Bottom Layer w10: v1(961,296) 1270,296
SCK2: M1.8 MCU1.26 U3.1 | length 1120.5
  Top Layer w10: MCU1.26 838.58,579.26 869.05,609.72 1009.72,609.72 1188.94,788.94 1222,788.94 1209,801.94 1209,1331 1253,1375 M1.8
SCL1: MCU1.42 R8.1 U1.1 U4.8 | length 653.6
  Top Layer w10: R8.1 446,568 v1(478,536) 584.16,429.84 MCU1.42
  Top Layer w15: U1.1@193.82,627.48 v1(193.82,669) U4.8
  Bottom Layer w10: v1(193.82,669) 326.82,536 v1(478,536)
SCL2: MCU1.45 P2.3 R14.2 | length 477.6
  Top Layer w10: R14.2@443.06,379.7 451.97,370.79 v1(486,370.79) MCU1.45
  Top Layer w20: P2.3 238.32,349.68 v1(239,349)
  Bottom Layer w10: v1(239,349) 464.21,349 v1(486,370.79)
SDA1: MCU1.43 R9.1 U1.3 U4.7 | length 733.2
  Top Layer w10: R9.1@444.06,499.9 454.1,499.9 v1(474,480) 543.84,410.16 MCU1.43
  Top Layer w15: U1.3 123.3,665.3 v1(129,671) 144.61,686.61 U4.7
  Bottom Layer w10: v1(129,671) 320,480 v1(474,480)
SDA2: MCU1.46 P2.2 R15.2 | length 479.8
  Top Layer w10: R15.2@443.06,319.6 v1(484,319.6) 514.6,319.6 546.1,351.1 MCU1.46
  Top Layer w20: P2.2 237.69,310.31 v1(238,310)
  Bottom Layer w10: v1(238,310) 474.4,310 v1(484,319.6)
SWCLK: MCU1.37 P1.3 | length 977
  Top Layer w10: P1.3 P1.3@60,1065 ; v1(587,557) 587,536 594.73,528.27 MCU1.37
  Bottom Layer w10: P1.3 112.47,1007.53 435.74,1007.53 600,843.27 600,570 v1(587,557)
SWDIO: MCU1.34 P1.2 | length 1006.7
  Top Layer w10: v1(674,623) 674,619 681.5,611.5 681.5,564.1 MCU1.34
  Bottom Layer w10: P1.2 68,1165 118,1115 179,1115 264,1030 438.72,1030 619,849.72 619,703.54 674,648.54 v1(674,623)
TX1: MCU1.30 R12.1 | length 851
  Top Layer w10: v1(343,1080) 343.33,1080.33 R12.1 ; MCU1.30 759.84,603.39 784,627.54 v1(784,633)
  Bottom Layer w10: v1(343,1080) 354,1069 473.72,1069 474.22,1069.5 522.5,1069.5 691,901 691,747 784,654 v1(784,633)
TX2: MCU1.12 R10.1 | length 1058.1
  Top Layer w10: R10.1 461,1121.44 461,1059 v1(491,1029) ; MCU1.12 861.97,280 v1(893,280)
  Bottom Layer w10: v1(491,1029) 491,1003.18 637,857.18 637,711 704,644 704,469 v1(893,280)
VCC3.3: C4.1 C5.1 C6.1 C7.2 C17.1 C19.1 C21.1 C22.1 D3.2 F1.1 L1.1 M1.1 MCU1.1 MCU1.9 MCU1.24 MCU1.36 MCU1.48 P1.1 P2.1 R3.2 R4.1 R5.1 R6.1 R8.2 R9.2 R14.1 R15.1 U1.4 U2.8 U2.13 U4.1 U4.2 | length 6258.5
  Top Layer w8: v1(1021,218) 1021,244.56 C21.1 C21.1@1058.56,283.56 ; C21.1@1065,283.56 1082.44,283.56 1122.13,243.87 1147.01,243.87 U2.8 ; v1(1126,143) 1170.4,143 1170.63,143.23 ; U2.13 1170.63,143.23 ; C19.1 1182.44,106.56 1170.63,118.37 1170.63,143.23
  Top Layer w10: C4.1@442.56,260 554.57,260 MCU1.48 MCU1.1 641.73,223.73 602.44,184.44 R3.2 ; C17.1 754.53,1347.56 M1.1 ; C6.1@716.56,769.56 C6.1 728,813 v1(730,815) ; MCU1.9 799.21,248.24 840.46,207 890,207 912.56,184.44 C5.1 895,147.44 v1(895,123) ; MCU1.24 C7.2@1097.67,528.27
  Top Layer w15: C22.1 103.86,542.44 U1.4 U1.4@123.3,499.7 ; P1.1 104,1216 104,917 144.61,876.39 U4.2 U4.1 390,630 v2(390,626) ; R14.1@380.5,380.5 R14.1 R15.1 347,318 299.94,270.94 ; C4.1 442.56,245.56 414,217 353.89,217 299.94,270.94 ; 628,577.43 MCU1.36@636.22,569.22 ; 628,580 628,681 ; C6.1@716.56,769.56 628,681 ; M1.1 803,1375 850,1328 850,1106 v2(1001,955) 1030,955 1075,910 L1.1 ; MCU1.24@897.08,529.08 v1(915,547) ; U1.4@123.3,499.7 123.3,292.7 145.06,270.94 P2.1 299.94,270.94 ; U1.4@123.3,499.7 162,461 329,461 373.5,505.5 R9.2 388.94,566.5 R8.2 390,568.44 v2(390,626) ; v2(390,626) 392,624 571,624 628,681
  Bottom Layer w10: v1(602.44,88) 602.44,86.56 858.56,86.56 v1(895,123) 895,171 942,218 v1(1021,218) ; v1@1019.5,216.5 1093,143 v1(1126,143)
  Bottom Layer w15: v2(390,626) 450,686 F1.1 505.43,800.57 D3.2 ; v1(730,815) 730,753 769.56,713.44 R4.1 R6.1 ; v1(915,547) 915,548 899,564 R6.1 ; v2(1001,955) 986,955 952,921 952,752 913.44,713.44 R6.1
VCC5: C10.1 C11.2 F2.2 F3.2 U5.1 U5.3 | length 605.4
  Top Layer w15: U5.1 505.3,891.7 482,915 482,942 506.7,966.7 U5.3
  Top Layer w20: C10.1 522.15,880.85 U5.1 583.7,891.7 594.44,902.44 C11.2 ; U5.3 533,974 620,1061 F2.2 F3.2
pads on no net: H0.1 H1.1 H2.1 H3.1 M1.4 MCU1.0 MCU1.2 MCU1.3 MCU1.4 MCU1.21 MCU1.25 MCU1.38 MCU1.39 MCU1.40 MCU1.41 P2.0 P3.0 U2.1 U2.2 U2.3 U2.4 U2.5 U2.6 U2.7 U2.14 U2.15 U2.16 U2.17 U2.19 U2.21 U3.0 U3.3 U3.7 U3.14 U3.15 U4.6

## Polygon pours and split planes (outlines as drawn)
GND on Top Layer "Top Layer-No Net 1" (solid, remove dead copper, pour order 6): -11,1517 1498,1517 1508,1507 1508,-17 -19,-17 -38,2
GND on Bottom Layer "Top Layer-No Net 1" (solid, remove dead copper, pour order 9): -16,1508 1525,1508 1518,1501 1518,-16 15,-16 -26,25

## Keep-outs
Keep-Out Layer:
  the board outline again, w5

## Silkscreen, mask and mechanical layers (free items; w line width, h text height)
Top Overlay:
  circle w5: c1375,1227 r15.81
  circle w5: c478,707 r15.81
  lines w5: 251,1281.42 251,1471
  lines w7: 455,646 477,624 478,624 ; 499,645 478,624 ; 556,685 578,707 578,708 557,729 ; 573,707 478,707 478,624 ; 1352,1166 1374,1144 1375,1144 ; 1396,1165 1375,1144 ; 1453,1205 1475,1227 1475,1228 1454,1249 ; 1470,1227 1375,1227 1375,1144
  text "3" at 215,1420 h54
  text "5" at 257,1420 h54
  text "D" at 217,1376 h54
  text "T" at 286,1376 h54
  text "C" at 215,1333 h54
  text "R" at 257,1333 h54
  text "G" at 214,1287 h54
  text "G" at 256,1287 h54
  text "Y" at 1436,1261 h63
  text "R" at 568,1256 h54
  text "G" at 527,1255 h54
  text "T" at 599,1254 h54
  text "3" at 626,1254 h54
  text "X" at 1361,1088 h63
  text "R13-R11" at 286,1030 h54
  text "Y" at 585,679 h63
  text "X" at 501,592 h63
  text "B1" at 1320,516 h54
  text "G" at 201,427 h54
  text "B0" at 1317,415 h54
  text "A4" at 1312,318 h54
  text "CL" at 197,215.62 h54
  text "A0" at 1312,213 h54
  text "DA" at 202,176 h54
  text "3" at 203,135 h54
Bottom Overlay:
  text "MINI-AHRS" at 909,457 h90
  text "EV-HEU" at 849,365 h90